# Altium PCB Copy of PCB1.PcbDoc (part 3 of 3)
Units mil, origin at the board's own origin, x right, y up, seen from the top; angles counter-clockwise.
Board outline 2060 x 2060 mil, 4 copper layers (L1, L2, L3, L4), stack 61.583 mil thick; 50 components, 94 nets, 313 pads, 31 vias.
Unrouted connection lines stored in the file: 190.
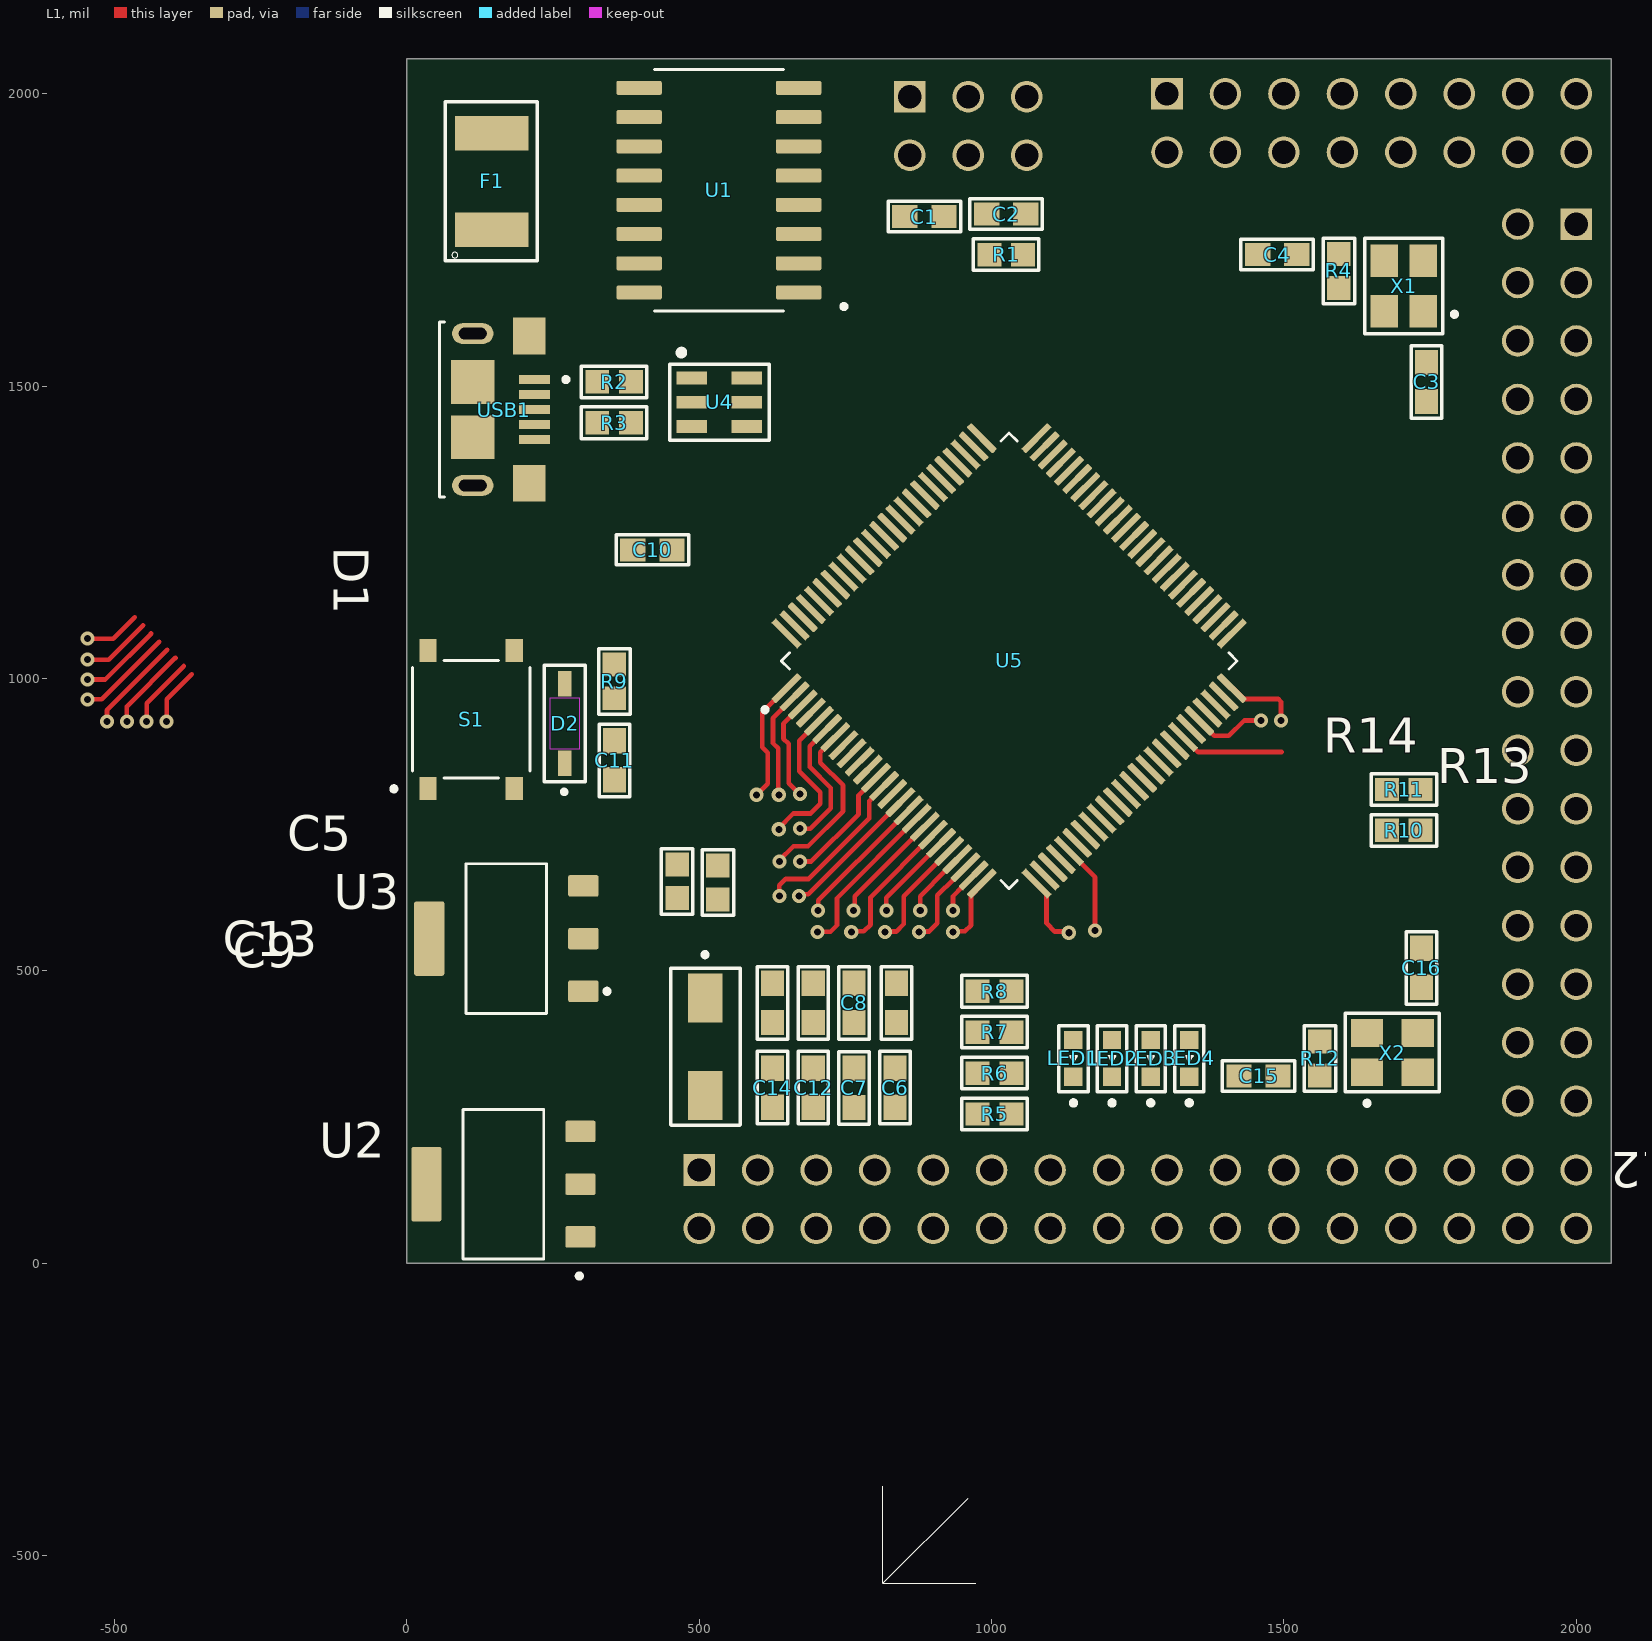
[diagram p0: L1 view]

## Part data (continued)
R5 R6 R7 R8 R13 R14: library part RC0603FR-071KL, "RES 1K OHM 1% 1/10W 0603", Case Code (Imperial)=0603, Manufacturer 1="Yageo Group", Max Operating Temperature=155°C, Min Operating Temperature=-55°C, Power Rating=100mW, Supplier Part Number 1=311-1.00KHRDKR-ND, Temperature Coefficient=100ppm/°C, Tolerance=1%, Voltage Rating=50V, Working Voltage=75V, Case Code (Metric)=0603, Case/Package=0603, China RoHS=Non-Compliant, ComponentLink1Description=https://datasheet.octopart.com:443/RC0603FR-071KL-Yageo-datasheet-175887523.pdf?src-supplier=Newark, ComponentLink1URL=https://datasheet.octopart.com:443/RC0603FR-071KL-Yageo-datasheet-175887523.pdf?src-supplier=Newark, ComponentLink2Description=https://datasheet.octopart.com:443/RC0603FR-071KL-Yageo-datasheet-34211833.pdf?src-supplier=Newark, ComponentLink2URL=https://datasheet.octopart.com:443/RC0603FR-071KL-Yageo-datasheet-34211833.pdf?src-supplier=Newark, ComponentLink3Description=https://datasheet.octopart.com:443/RC0603FR-071KL-Yageo-datasheet-12596169.pdf?src-supplier=Newark, ComponentLink3URL=https://datasheet.octopart.com:443/RC0603FR-071KL-Yageo-datasheet-12596169.pdf?src-supplier=Newark, ComponentLink4Description=https://datasheet.octopart.com:443/RC0603FR-071KL-Yageo-datasheet-499455.pdf?src-supplier=Newark, ComponentLink4URL=https://datasheet.octopart.com:443/RC0603FR-071KL-Yageo-datasheet-499455.pdf?src-supplier=Newark, ComponentLink5Description=https://datasheet.octopart.com:443/RC0603FR-071KL-Yageo-datasheet-503470.pdf?src-supplier=Newark, ComponentLink5URL=https://datasheet.octopart.com:443/RC0603FR-071KL-Yageo-datasheet-503470.pdf?src-supplier=Newark, ComponentLink6Description=https://datasheet.octopart.com:443/RC0603FR-071KL-Yageo-datasheet-62067350.pdf?src-supplier=element14+APAC, ComponentLink6URL=https://datasheet.octopart.com:443/RC0603FR-071KL-Yageo-datasheet-62067350.pdf?src-supplier=element14+APAC, ComponentLink7Description=https://datasheet.octopart.com:443/RC0603FR-071KL-Yageo-datasheet-21426514.pdf?src-supplier=element14+APAC, ComponentLink7URL=https://datasheet.octopart.com:443/RC0603FR-071KL-Yageo-datasheet-21426514.pdf?src-supplier=element14+APAC, ComponentLink8Description=https://datasheet.octopart.com:443/RC0603FR-071KL-Yageo-datasheet-141265859.pdf?src-supplier=Upverter, ComponentLink8URL=https://datasheet.octopart.com:443/RC0603FR-071KL-Yageo-datasheet-141265859.pdf?src-supplier=Upverter, ComponentLink9Description=https://datasheet.octopart.com:443/RC0603FR-071KL-Yageo-datasheet-103092701.pdf?src-supplier=Upverter, ComponentLink9URL=https://datasheet.octopart.com:443/RC0603FR-071KL-Yageo-datasheet-103092701.pdf?src-supplier=Upverter, ComponentLink10Description=https://sigma.octopart.com:443/138820526/technical_drawing/Yageo-RC0603FR-071KL.pdf?src-supplier=Upverter, ComponentLink10URL=https://sigma.octopart.com:443/138820526/technical_drawing/Yageo-RC0603FR-071KL.pdf?src-supplier=Upverter, ComponentLink11Description=https://datasheet.octopart.com:443/RC0603FR-071KL-Yageo-datasheet-68297981.pdf?src-supplier=Upverter, ComponentLink11URL=https://datasheet.octopart.com:443/RC0603FR-071KL-Yageo-datasheet-68297981.pdf?src-supplier=Upverter, ComponentLink12Description=https://datasheet.octopart.com:443/RC0603FR-071KL-Yageo-datasheet-8328172.pdf?src-supplier=Farnell, ComponentLink12URL=https://datasheet.octopart.com:443/RC0603FR-071KL-Yageo-datasheet-8328172.pdf?src-supplier=Farnell, ComponentLink13Description=https://datasheet.octopart.com:443/RC0603FR-071KL-Yageo-datasheet-13691069.pdf?src-supplier=Farnell, ComponentLink13URL=https://datasheet.octopart.com:443/RC0603FR-071KL-Yageo-datasheet-13691069.pdf?src-supplier=Farnell, ComponentLink14Description=https://datasheet.octopart.com:443/RC0603FR-071KL-Yageo-datasheet-15599030.pdf?src-supplier=Seeed+Studio, ComponentLink14URL=https://datasheet.octopart.com:443/RC0603FR-071KL-Yageo-datasheet-15599030.pdf?src-supplier=Seeed+Studio, ComponentLink15Description=https://datasheet.octopart.com:443/RC0603FR-071KL-Yageo-Group-datasheet-176638170.pdf?src-supplier=Future+Electronics, ComponentLink15URL=https://datasheet.octopart.com:443/RC0603FR-071KL-Yageo-Group-datasheet-176638170.pdf?src-supplier=Future+Electronics, ComponentLink16Description=https://datasheet.octopart.com:443/RC0603FR-071KL-Yageo-datasheet-164759695.pdf?src-supplier=Future+Electronics, ComponentLink16URL=https://datasheet.octopart.com:443/RC0603FR-071KL-Yageo-datasheet-164759695.pdf?src-supplier=Future+Electronics, ComponentLink17Description=https://datasheet.octopart.com:443/RC0603FR-071KL-Yageo-datasheet-137700087.pdf?src-supplier=Future+Electronics, ComponentLink17URL=https://datasheet.octopart.com:443/RC0603FR-071KL-Yageo-datasheet-137700087.pdf?src-supplier=Future+Electronics, ComponentLink18Description=https://datasheet.octopart.com:443/RC0603FR071KL-Yageo-datasheet-27584510.pdf?src-supplier=Future+Electronics, ComponentLink18URL=https://datasheet.octopart.com:443/RC0603FR071KL-Yageo-datasheet-27584510.pdf?src-supplier=Future+Electronics, ComponentLink19Description=https://datasheet.octopart.com:443/RC0603FR-071KL-Yageo-datasheet-8324193.pdf?src-supplier=Future+Electronics, ComponentLink19URL=https://datasheet.octopart.com:443/RC0603FR-071KL-Yageo-datasheet-8324193.pdf?src-supplier=Future+Electronics, ComponentLink20Description=https://datasheet.octopart.com:443/RC0603FR-071KL-Yageo-datasheet-79472498.pdf?src-supplier=Megastar, ComponentLink20URL=https://datasheet.octopart.com:443/RC0603FR-071KL-Yageo-datasheet-79472498.pdf?src-supplier=Megastar, ComponentLink21Description=https://datasheet.octopart.com/RC0603FR-071KL-Yageo-datasheet-73766026.pdf, ComponentLink21URL=https://datasheet.octopart.com/RC0603FR-071KL-Yageo-datasheet-73766026.pdf, ComponentLink22Description=https://datasheet.octopart.com:443/RC0603FR-071KL-Yageo-datasheet-118562.pdf?src-supplier=DigiKey, ComponentLink22URL=https://datasheet.octopart.com:443/RC0603FR-071KL-Yageo-datasheet-118562.pdf?src-supplier=DigiKey, ComponentLink23Description=http://sigma.octopart.com:80/conflict_mineral_statement/Yageo-company-3.pdf?src-supplier=Compliance+Statements, ComponentLink23URL=http://sigma.octopart.com:80/conflict_mineral_statement/Yageo-company-3.pdf?src-supplier=Compliance+Statements, ComponentLink24Description=http://sigma.octopart.com:80/rohs_statement/Yageo-company-2.pdf?src-supplier=Compliance+Statements, ComponentLink24URL=http://sigma.octopart.com:80/rohs_statement/Yageo-company-2.pdf?src-supplier=Compliance+Statements, Composition="Thick Film", Contact Plating=Tin, Country of Origin="Mainland China, Taiwan", Depth=800µm, Export Control Classification Number (ECCN) Code=EAR99, Harmonized Tariff Schedule (HTS) Code=8533.21.00.30, Height=450µm, Introduction Date=2004-10-04, Lead Free="Lead Free", Length=1.6mm, Lifecycle Status=Production, Manufacturer Part Number 1=RC0603FR-071KL, Military Standard=Not, Mounting Technology="Surface Mount", Number of Terminals=2, Packaging="Tape and Reel", Pins=2, Pricing 1="1=0.1, 10=0.025, 25=0.0188, 50=0.015, 100=0.0122, 250=0.0094, 500=0.00782, 1000=0.00661 (USD)", Radiation Hardening=No, REACH SVHC=Unaffected, RoHS=Compliant, Schedule B="8533210045, 8533210045|8533210045|8533210045|8533210045|8533210045|8533210045|8533210045|8533210045|8533210045|8533210045|8533210045|8533210045|8533210045|8533210045|8533210045|8533210045|8533210045|8533210045|8533210045|8533210045|8533210045|8533210045|8533210045|85", Stock 1=4851130, Supplier 1=DigiKey, Termination=SMD/SMT, Voltage Rating (DC)=50V, Width=800µm
S1: library part TS-1187A-B-A-B, "SWITCH TACTILE SPST-NO 0.05A 12V SMD 3X4MM"
U1: "USB to Serial UART Interface Controller IC, SOP-16, 5V/3.3V, 12MHz External Crystal Required"
U2: "IC REG LINEAR 5.1V 1A SOT-223-3L", Manufacturer=Revvo, Supplier Part Number=5272-AMS1117-5.0TR-ND, Category="LDO Voltage Regulators", Manufacturer Part Number=AMS1117-5.0, Pricing="2500=0.12353, 5000=0.11968, 7500=0.11775, 12500=0.11561, 17500=0.11436, 25000=0.11316 (USD)", Stock=12500, Supplier=DigiKey
U3: "IC REG LINEAR 3.3V 1A SOT-223-3L", Manufacturer="UMW(Youtai Semiconductor Co., Ltd.)", Supplier Part Number=4518-AMS1117-3.3TR-ND, Category="LDO Voltage Regulators", Manufacturer Part Number=AMS1117-3.3, Pricing="2500=0.1247, 5000=0.12082, 7500=0.11888, 12500=0.11673, 17500=0.11547, 25000=0.11426 (USD)", Stock=20000, Supplier=DigiKey
U4: library part SRV05-4MR6T1G, "TVS DIODE 5VWM 17.5VC 6TSOP", Breakdown Voltage=6V, Case/Package=TSOP, Clamping Voltage=17.5V, Leakage Current=5µA, Manufacturer=onsemi, Manufacturer Lifecycle Status=ACTIVE, Max Operating Temperature=125°C, Min Operating Temperature=-55°C, Peak Pulse Current=5A, Peak Pulse Power=300W, Power Line Protection=Yes, Reverse Standoff Voltage=5V, Supplier Part Number=488-SRV05-4MR6T1GDKR-ND, Category="TVS Diodes", China RoHS=Compliant, ComponentLink1Description=https://datasheet.octopart.com:443/SRV05-4MR6T1G-ON-Semiconductor-datasheet-101150056.pdf?src-supplier=Electro+Sonic, ComponentLink1URL=https://datasheet.octopart.com:443/SRV05-4MR6T1G-ON-Semiconductor-datasheet-101150056.pdf?src-supplier=Electro+Sonic, ComponentLink2Description=https://datasheet.octopart.com:443/SRV05-4MR6T1G-onsemi-datasheet-180969720.pdf?src-supplier=IHS, ComponentLink2URL=https://datasheet.octopart.com:443/SRV05-4MR6T1G-onsemi-datasheet-180969720.pdf?src-supplier=IHS, ComponentLink3Description=https://datasheet.octopart.com:443/SRV05-4MR6T1G-ON-Semiconductor-datasheet-37178284.pdf?src-supplier=Future+Electronics, ComponentLink3URL=https://datasheet.octopart.com:443/SRV05-4MR6T1G-ON-Semiconductor-datasheet-37178284.pdf?src-supplier=Future+Electronics, ComponentLink4Description=https://datasheet.octopart.com:443/SRV05-4MR6T1G-ON-Semiconductor-datasheet-100437403.pdf?src-supplier=Farnell, ComponentLink4URL=https://datasheet.octopart.com:443/SRV05-4MR6T1G-ON-Semiconductor-datasheet-100437403.pdf?src-supplier=Farnell, ComponentLink5Description=https://datasheet.octopart.com:443/SRV05-4MR6T1G-onsemi-datasheet-164731279.pdf?src-supplier=Newchip+Electronics+Limited, ComponentLink5URL=https://datasheet.octopart.com:443/SRV05-4MR6T1G-onsemi-datasheet-164731279.pdf?src-supplier=Newchip+Electronics+Limited, ComponentLink6Description=http://sigma.octopart.com:80/150631685/rohs_statement/ON-Semiconductor-SRV05-4MR6T1G.pdf?src-supplier=Compliance+Statements, ComponentLink6URL=http://sigma.octopart.com:80/150631685/rohs_statement/ON-Semiconductor-SRV05-4MR6T1G.pdf?src-supplier=Compliance+Statements, ComponentLink7Description=http://sigma.octopart.com:80/reach_statement/ON-Semiconductor-company-79.pdf?src-supplier=Compliance+Statements, ComponentLink7URL=http://sigma.octopart.com:80/reach_statement/ON-Semiconductor-company-79.pdf?src-supplier=Compliance+Statements, ComponentLink8Description=https://octopart.com:443/opatz8j6/c1?t=GRxjOYfY8n1k7dEGnypKsoXJdizG2AyD9Dp9f5Qv8c1VKoN6Hi3oNDCVMFQ1YA2smcwUYk7_76S3Ef3Va8VDMphxCFMUbAegA5s6gVuY1yDEeomlnwz1aAKRIpnWkIz8LXicEWMcXhbWzpBI80n6_k_-slWBpLxY0NALUvjCUcDg2IL1fScQjZ7PuufKuxm_nn3UzkM4saBqj0lTwdOAMWbn7IoLSNr2avL33e6zQMcHuFNsVRsb1LLhsdyz2XVsDLyzl6dAmv0uXcf72h1DDLkKQol2Y6UBQGHK0dqwsy23JJC0slEMc9s0aJfe8dT4jPLvdDcjp3fcfNZxSGJOQqM-c0A9ey8i6J50A0KjVuwk&src-supplier=Compliance+Statements, ComponentLink8URL=https://octopart.com:443/opatz8j6/c1?t=GRxjOYfY8n1k7dEGnypKsoXJdizG2AyD9Dp9f5Qv8c1VKoN6Hi3oNDCVMFQ1YA2smcwUYk7_76S3Ef3Va8VDMphxCFMUbAegA5s6gVuY1yDEeomlnwz1aAKRIpnWkIz8LXicEWMcXhbWzpBI80n6_k_-slWBpLxY0NALUvjCUcDg2IL1fScQjZ7PuufKuxm_nn3UzkM4saBqj0lTwdOAMWbn7IoLSNr2avL33e6zQMcHuFNsVRsb1LLhsdyz2XVsDLyzl6dAmv0uXcf72h1DDLkKQol2Y6UBQGHK0dqwsy23JJC0slEMc9s0aJfe8dT4jPLvdDcjp3fcfNZxSGJOQqM-c0A9ey8i6J50A0KjVuwk&src-supplier=Compliance+Statements, ComponentLink9Description=https://octopart.com:443/opatz8j6/c1?t=lIUu1jb1ZZRo0qNmGIs9ba_OX116NqmQw_7oX-a3VPsaRdpp2HX_z2MCNOU07deCx-7PfvGmO6_0MJ30XVqsocWFNYMuX7jSZV6OPR9qZBLnVN_NcijYgOZ6fSGcJacu18z9XUouhaVhsRzrXPPLHaw78_5sQ7NBQwHcDioWErEMnZRHVeQUftrR8xKUYOxNwSSeqHi24SW0Dez_z3TsJuZaMiNnjW8b7pRvXBZcZ57ZArFUxPiKq0rrWhwKV2e6QnTz9xddmIQnZCvSJURlCU66Y9JTKD93_tff41mJUd2RJ-VHH_GdqJ18jt0FG4i79NtaZFXnkA15LDipeISURt08TJ8Mcy9aqVk_kUsfhXY&src-supplier=Compliance+Statements, ComponentLink9URL=https://octopart.com:443/opatz8j6/c1?t=lIUu1jb1ZZRo0qNmGIs9ba_OX116NqmQw_7oX-a3VPsaRdpp2HX_z2MCNOU07deCx-7PfvGmO6_0MJ30XVqsocWFNYMuX7jSZV6OPR9qZBLnVN_NcijYgOZ6fSGcJacu18z9XUouhaVhsRzrXPPLHaw78_5sQ7NBQwHcDioWErEMnZRHVeQUftrR8xKUYOxNwSSeqHi24SW0Dez_z3TsJuZaMiNnjW8b7pRvXBZcZ57ZArFUxPiKq0rrWhwKV2e6QnTz9xddmIQnZCvSJURlCU66Y9JTKD93_tff41mJUd2RJ-VHH_GdqJ18jt0FG4i79NtaZFXnkA15LDipeISURt08TJ8Mcy9aqVk_kUsfhXY&src-supplier=Compliance+Statements, Depth=1.5mm, Direction=Unidirectional, Lead Free="Lead Free", Length=3mm, Lifecycle Status=Production, Manufacturer Part Number=SRV05-4MR6T1G, Min Breakdown Voltage=6V, Number of Bidirectional Channels=4, Number of Channels=4, Number of Elements=1, Number of Terminals=6, Packaging="Tape and Reel", Peak Reverse Current=5µA, Pins=6, Polarity=Unidirectional, Pricing="1=3.34, 10=2.171, 50=1.6658, 100=1.503, 500=1.21752 (USD)", Radiation Hardening=No, REACH SVHC=Unaffected, RoHS=Compliant, Schedule B="8536300000, 8536300000|8536300000|8536300000|8536300000|8536300000", Stock=11826, Supplier=DigiKey, Working Voltage=5V
U5: "IC MCU 8BIT 256KB FLASH 100TQFP", Case/Package=TQFP, Clock Frequency=16MHz, Manufacturer=Microchip, Manufacturer Lifecycle Status=REL, Max Operating Temperature=85°C, Max Supply Voltage=5.5V, Min Operating Temperature=-40°C, Min Supply Voltage=4.5V, Operating Supply Voltage=5V, Supplier Part Number=ATMEGA2560-16AU-ND, Access Time=16µs, Category=Microcontrollers, ComponentLink1Description=https://datasheet.octopart.com:443/ATMEGA2560-16AU-Microchip-datasheet-141243538.pdf?src-supplier=Microchip, ComponentLink1URL=https://datasheet.octopart.com:443/ATMEGA2560-16AU-Microchip-datasheet-141243538.pdf?src-supplier=Microchip, ComponentLink2Description=https://datasheet.octopart.com:443/ATMEGA2560-16AU-Microchip-datasheet-24967521.pdf?src-supplier=element14+APAC, ComponentLink2URL=https://datasheet.octopart.com:443/ATMEGA2560-16AU-Microchip-datasheet-24967521.pdf?src-supplier=element14+APAC, ComponentLink3Description=https://datasheet.octopart.com:443/ATMEGA2560-16AU-Microchip-datasheet-62057665.pdf?src-supplier=element14+APAC, ComponentLink3URL=https://datasheet.octopart.com:443/ATMEGA2560-16AU-Microchip-datasheet-62057665.pdf?src-supplier=element14+APAC, ComponentLink4Description=https://datasheet.octopart.com:443/ATMEGA2560-16AU-Microchip-datasheet-46907977.pdf?src-supplier=SHENGYU+ELECTRONICS, ComponentLink4URL=https://datasheet.octopart.com:443/ATMEGA2560-16AU-Microchip-datasheet-46907977.pdf?src-supplier=SHENGYU+ELECTRONICS, ComponentLink5Description=https://sigma.octopart.com:443/138797047/technical_drawing/Microchip-ATMEGA2560-16AU.pdf?src-supplier=Upverter, ComponentLink5URL=https://sigma.octopart.com:443/138797047/technical_drawing/Microchip-ATMEGA2560-16AU.pdf?src-supplier=Upverter, ComponentLink6Description=https://datasheet.octopart.com:443/ATMEGA2560-16AU-Microchip-datasheet-136948588.pdf?src-supplier=Master+Electronics, ComponentLink6URL=https://datasheet.octopart.com:443/ATMEGA2560-16AU-Microchip-datasheet-136948588.pdf?src-supplier=Master+Electronics, ComponentLink7Description=https://datasheet.octopart.com:443/ATMEGA2560-16AU-Atmel-datasheet-5357710.pdf?src-supplier=TME, ComponentLink7URL=https://datasheet.octopart.com:443/ATMEGA2560-16AU-Atmel-datasheet-5357710.pdf?src-supplier=TME, ComponentLink8Description=https://datasheet.octopart.com:443/ATMEGA2560-16AU-Microchip-datasheet-12542.pdf?src-supplier=element14, ComponentLink8URL=https://datasheet.octopart.com:443/ATMEGA2560-16AU-Microchip-datasheet-12542.pdf?src-supplier=element14, ComponentLink9Description=https://datasheet.octopart.com:443/ATMEGA2560-16AU-Atmel-datasheet-13399453.pdf?src-supplier=_legacy+Avnet, ComponentLink9URL=https://datasheet.octopart.com:443/ATMEGA2560-16AU-Atmel-datasheet-13399453.pdf?src-supplier=_legacy+Avnet, ComponentLink10Description=https://datasheet.octopart.com:443/ATMEGA2560-16AU-Microchip-datasheet-120916.pdf?src-supplier=RS+(Formerly+Allied+Electronics), ComponentLink10URL=https://datasheet.octopart.com:443/ATMEGA2560-16AU-Microchip-datasheet-120916.pdf?src-supplier=RS+(Formerly+Allied+Electronics), ComponentLink11Description=http://sigma.octopart.com:80/188449921/materials_sheet/Microchip-ATMEGA2560-16AU.pdf?src-supplier=Compliance+Statements, ComponentLink11URL=http://sigma.octopart.com:80/188449921/materials_sheet/Microchip-ATMEGA2560-16AU.pdf?src-supplier=Compliance+Statements, ComponentLink12Description=http://sigma.octopart.com:80/rohs_statement/Microchip-company-71.pdf?src-supplier=Compliance+Statements, ComponentLink12URL=http://sigma.octopart.com:80/rohs_statement/Microchip-company-71.pdf?src-supplier=Compliance+Statements, ComponentLink13Description=http://sigma.octopart.com:80/reach_statement/Microchip-company-70.pdf?src-supplier=Compliance+Statements, ComponentLink13URL=http://sigma.octopart.com:80/reach_statement/Microchip-company-70.pdf?src-supplier=Compliance+Statements, ComponentLink14Description=http://sigma.octopart.com:80/conflict_mineral_statement/Microchip-company-69.pdf?src-supplier=Compliance+Statements, ComponentLink14URL=http://sigma.octopart.com:80/conflict_mineral_statement/Microchip-company-69.pdf?src-supplier=Compliance+Statements, ComponentLink15Description=http://sigma.octopart.com:80/conflict_mineral_statement/Microchip-company-68.pdf?src-supplier=Compliance+Statements, ComponentLink15URL=http://sigma.octopart.com:80/conflict_mineral_statement/Microchip-company-68.pdf?src-supplier=Compliance+Statements, ComponentLink16Description=http://sigma.octopart.com:80/reach_statement/Atmel-company-6.pdf?src-supplier=Compliance+Statements, ComponentLink16URL=http://sigma.octopart.com:80/reach_statement/Atmel-company-6.pdf?src-supplier=Compliance+Statements, ComponentLink17Description=http://sigma.octopart.com:80/rohs_statement/Atmel-company-5.pdf?src-supplier=Compliance+Statements, ComponentLink17URL=http://sigma.octopart.com:80/rohs_statement/Atmel-company-5.pdf?src-supplier=Compliance+Statements, ComponentLink18Description=http://sigma.octopart.com:80/rohs_statement/Atmel-company-4.pdf?src-supplier=Compliance+Statements, ComponentLink18URL=http://sigma.octopart.com:80/rohs_statement/Atmel-company-4.pdf?src-supplier=Compliance+Statements, Core Architecture=AVR, Country of Assembly=Thailand, Country of Fabrication="United States of America", Country of Origin=Thailand, Data Bus Width=8b, Density=2Mb, Export Control Classification Number (ECCN) Code=EAR99, Frequency=16MHz, Harmonized Tariff Schedule (HTS) Code=8542.31.0015, Height=1.2mm, HS Code=8542.31.0015, Interface="2-Wire, I2C, SPI, USART", Lead Free="Lead Free", Length=14.1mm, Lifecycle Status=Production, Manufacturer Part Number=ATMEGA2560-16AU, Memory Format=FLASH, Memory Size=256kB, Mounting Technology="Surface Mount", Number of A/D Converters=1, Number of ADC Channels=16, Number of I2C Channels=1, Number of I/Os=86, Number of Programmable I/O=86, Number of PWM Channels=20, Number of SPI Channels=5, Number of Terminals=100, Number of Timers/Counters=6, Number of UART Channels=4, Oscillator Type=Internal, Peripherals="Brown-out Detect/Reset, POR, PWM, WDT", Pins=100, Pricing="1=18.11 (USD)", Projected EOL Date=2039-11-01, Radiation Hardening=No, RAM Size=8kB, REACH SVHC=Unaffected, RoHS=Compliant, Schedule B="8542310000, 8542310000|8542310000|8542310000|8542310000|8542310000", Stock=12847, Supplier=DigiKey, Termination=SMD/SMT, Watchdog Timer=Yes, Width=14.1mm
USB1: library part 10118193-0001LF, "CONN RCPT USB2.0 MICRO B SMD R/A", Color=Black, Contact Resistance=30mΩ, Current Rating=1.8A, Dielectric Material="Liquid Crystal Polymer", Flammability Rating="UL94 V-0", Insulation Resistance=1GΩ, Manufacturer="Amphenol Communications Solutions", Max Operating Temperature=80°C, Max Voltage Rating (AC)=100V, Min Operating Temperature=-55°C, Operating Force=35.1392N, Supplier Part Number=609-4616-1-ND, Category="USB Connectors", China RoHS=Compliant, ComponentLink1Description=https://datasheet.octopart.com:443/10118193-0001LF-Amphenol-Communications-Solutions-datasheet-182239125.pdf?src-supplier=IHS, ComponentLink1URL=https://datasheet.octopart.com:443/10118193-0001LF-Amphenol-Communications-Solutions-datasheet-182239125.pdf?src-supplier=IHS, ComponentLink2Description=https://datasheet.octopart.com:443/10118193-0001LF-Amphenol-Communications-Solutions-datasheet-55953155.pdf?src-supplier=TME, ComponentLink2URL=https://datasheet.octopart.com:443/10118193-0001LF-Amphenol-Communications-Solutions-datasheet-55953155.pdf?src-supplier=TME, ComponentLink3Description=https://datasheet.octopart.com:443/10118193-0001LF-Amphenol-ICC-datasheet-116246833.pdf?src-supplier=Upverter, ComponentLink3URL=https://datasheet.octopart.com:443/10118193-0001LF-Amphenol-ICC-datasheet-116246833.pdf?src-supplier=Upverter, ComponentLink4Description=https://datasheet.octopart.com:443/10118193-0001LF-FCI-datasheet-141913714.pdf?src-supplier=Upverter, ComponentLink4URL=https://datasheet.octopart.com:443/10118193-0001LF-FCI-datasheet-141913714.pdf?src-supplier=Upverter, ComponentLink5Description=https://datasheet.octopart.com:443/10118193-0001LF-Amphenol-Communications-Solutions-datasheet-96019471.pdf?src-supplier=element14+APAC, ComponentLink5URL=https://datasheet.octopart.com:443/10118193-0001LF-Amphenol-Communications-Solutions-datasheet-96019471.pdf?src-supplier=element14+APAC, ComponentLink6Description=https://datasheet.octopart.com:443/10118193-0001LF-Amphenol-Communications-Solutions-datasheet-11792339.pdf?src-supplier=Electro+Sonic, ComponentLink6URL=https://datasheet.octopart.com:443/10118193-0001LF-Amphenol-Communications-Solutions-datasheet-11792339.pdf?src-supplier=Electro+Sonic, ComponentLink7Description=https://datasheet.octopart.com:443/10118193-0001LF-Amphenol-Communications-Solutions-datasheet-13702206.pdf?src-supplier=RS+(Formerly+Allied+Electronics), ComponentLink7URL=https://datasheet.octopart.com:443/10118193-0001LF-Amphenol-Communications-Solutions-datasheet-13702206.pdf?src-supplier=RS+(Formerly+Allied+Electronics), Connector Type="Receptacle, USB", Contact Material="Gold, Nickel", Contact Plating=Gold, Depth=5.67mm, Features=Shielded, Gender=Female, Height=3mm, Housing Material=Polymer, Length=7.86mm, Lifecycle Status=Production, Manufacturer Part Number=10118193-0001LF, Mounting Technology="Horizontal, Surface Mount", Number of Contacts=5, Number of Ports=1, Number of Positions=5, Number of Rows=1, Number of Terminals=5, Orientation="Right Angle", Pins=11, Pitch=650µm, Plating Thickness=762nm, Pricing="1=0.5, 10=0.422, 25=0.3952, 50=0.3762, 100=0.3583, 250=0.3358, 500=0.31976 (USD)", Radiation Hardening=No, REACH SVHC=Unaffected, RoHS=Compliant, Shell Material="Stainless Steel", Stock=63727, Supplier=DigiKey, Terminal Pitch=660.4µm, Termination=Solder, USB Standard="USB 2.0", Voltage Rating=100V
X1: library part 7M-12.000MAAJ-T, "CRYSTAL 12.0000MHZ 18PF SMD", Case/Package=SMD/SMT, ESR (Equivalent Series Resistance)=80Ω, Frequency Stability=30ppm, Frequency Tolerance=0.003%, Load Capacitance=18pF, Manufacturer 1=TXC, Max Operating Temperature=70°C, Min Operating Temperature=-20°C, Supplier Part Number 1=887-1121-2-ND, China RoHS=Compliant, ComponentLink1Description=https://datasheet.octopart.com:443/7M-12.000MAAJ-T-TXC-datasheet-175949319.pdf?src-supplier=Newark, ComponentLink1URL=https://datasheet.octopart.com:443/7M-12.000MAAJ-T-TXC-datasheet-175949319.pdf?src-supplier=Newark, ComponentLink2Description=https://datasheet.octopart.com:443/7M-12.000MAAJ-T-TXC-datasheet-142346318.pdf?src-supplier=TME, ComponentLink2URL=https://datasheet.octopart.com:443/7M-12.000MAAJ-T-TXC-datasheet-142346318.pdf?src-supplier=TME, ComponentLink3Description=https://datasheet.octopart.com:443/7M-12.000MAAJ-T-TXC-datasheet-24897103.pdf?src-supplier=ODG+(Origin+Data+Global), ComponentLink3URL=https://datasheet.octopart.com:443/7M-12.000MAAJ-T-TXC-datasheet-24897103.pdf?src-supplier=ODG+(Origin+Data+Global), ComponentLink4Description=https://datasheet.octopart.com:443/7M-12.000MAAJ-T-TXC-datasheet-10340792.pdf?src-supplier=element14+APAC, ComponentLink4URL=https://datasheet.octopart.com:443/7M-12.000MAAJ-T-TXC-datasheet-10340792.pdf?src-supplier=element14+APAC, ComponentLink5Description=https://datasheet.octopart.com:443/7M-12.000MAAJ-T-TXC-datasheet-15207195.pdf?src-supplier=element14+APAC, ComponentLink5URL=https://datasheet.octopart.com:443/7M-12.000MAAJ-T-TXC-datasheet-15207195.pdf?src-supplier=element14+APAC, ComponentLink6Description=https://datasheet.octopart.com:443/7M-12.000MAAJ-T-TXC-datasheet-8857452.pdf?src-supplier=Farnell, ComponentLink6URL=https://datasheet.octopart.com:443/7M-12.000MAAJ-T-TXC-datasheet-8857452.pdf?src-supplier=Farnell, ComponentLink7Description=https://datasheet.octopart.com:443/7M-12.000MAAJ-T-TXC-datasheet-10545748.pdf?src-supplier=Farnell, ComponentLink7URL=https://datasheet.octopart.com:443/7M-12.000MAAJ-T-TXC-datasheet-10545748.pdf?src-supplier=Farnell, ComponentLink8Description=https://datasheet.octopart.com:443/7M-12.000MAAJ-T-TXC-datasheet-10379982.pdf?src-supplier=Farnell, ComponentLink8URL=https://datasheet.octopart.com:443/7M-12.000MAAJ-T-TXC-datasheet-10379982.pdf?src-supplier=Farnell, Country of Origin="Mainland China", Depth=2.5mm, ESR=80Ω, Frequency=12MHz, Harmonized Tariff Schedule (HTS) Code=8541.60.00.50, Height=800µm, Introduction Date=2009-02-20, Lead Free="Lead Free", Length=3.2mm, Lifecycle Status=Production, Manufacturer Part Number 1=7M-12.000MAAJ-T, Mounting Technology="Surface Mount", Packaging="Tape & Reel", Pins=4, Pricing 1="3000=0.54592, 6000=0.52337, 9000=0.51063, 15000=0.49502 (USD)", REACH SVHC=Unaffected, RoHS=Compliant, Schedule B="8541600080, 8541600080|8541600080|8541600080|8541600080|8541600080", Stock 1=8397, Supplier 1=DigiKey, Termination=SMD/SMT, Tolerance=0.003%, Width=2.4892mm
X2: library part 7M-16.000MAAJ-T, "CRYSTAL 16.0000MHZ 18PF SMD", Case/Package=SMD/SMT, ESR (Equivalent Series Resistance)=60Ω, Frequency=16MHz, Frequency Stability=30ppm, Frequency Tolerance=0.003%, Load Capacitance=18pF, Manufacturer 1=TXC, Max Operating Temperature=70°C, Min Operating Temperature=-20°C, Supplier Part Number 1=887-1125-1-ND, China RoHS=Compliant, ComponentLink1Description=https://datasheet.octopart.com:443/7M-16.000MAAJ-T-TXC-datasheet-175949319.pdf?src-supplier=Newark, ComponentLink1URL=https://datasheet.octopart.com:443/7M-16.000MAAJ-T-TXC-datasheet-175949319.pdf?src-supplier=Newark, ComponentLink2Description=https://datasheet.octopart.com:443/7M-16.000MAAJ-T-TXC-datasheet-142346318.pdf?src-supplier=TME, ComponentLink2URL=https://datasheet.octopart.com:443/7M-16.000MAAJ-T-TXC-datasheet-142346318.pdf?src-supplier=TME, ComponentLink3Description=https://datasheet.octopart.com:443/7M-16.000MAAJ-T-TXC-datasheet-24897103.pdf?src-supplier=element14+APAC, ComponentLink3URL=https://datasheet.octopart.com:443/7M-16.000MAAJ-T-TXC-datasheet-24897103.pdf?src-supplier=element14+APAC, ComponentLink4Description=https://datasheet.octopart.com:443/7M-16.000MAAJ-T-TXC-datasheet-10340792.pdf?src-supplier=Future+Electronics, ComponentLink4URL=https://datasheet.octopart.com:443/7M-16.000MAAJ-T-TXC-datasheet-10340792.pdf?src-supplier=Future+Electronics, ComponentLink5Description=https://datasheet.octopart.com:443/7M-16.000MAAJ-T-TXC-datasheet-8857452.pdf?src-supplier=Farnell, ComponentLink5URL=https://datasheet.octopart.com:443/7M-16.000MAAJ-T-TXC-datasheet-8857452.pdf?src-supplier=Farnell, ComponentLink6Description=https://datasheet.octopart.com:443/7M-16.000MAAJ-T-TXC-datasheet-10545748.pdf?src-supplier=Farnell, ComponentLink6URL=https://datasheet.octopart.com:443/7M-16.000MAAJ-T-TXC-datasheet-10545748.pdf?src-supplier=Farnell, ComponentLink7Description=https://datasheet.octopart.com:443/7M-16.000MAAJ-T-TXC-datasheet-10379982.pdf?src-supplier=Farnell, ComponentLink7URL=https://datasheet.octopart.com:443/7M-16.000MAAJ-T-TXC-datasheet-10379982.pdf?src-supplier=Farnell, Country of Origin="Mainland China", Depth=2.5mm, ESR=60Ω, Height=800µm, Introduction Date=2014-01-27, Length=3.2mm, Lifecycle Status=Production, Manufacturer Part Number 1=7M-16.000MAAJ-T, Mounting Technology="Surface Mount", Packaging="Tape & Reel", Pins=4, Pricing 1="1=0.64, 10=0.553, 25=0.5228, 50=0.501, 100=0.4803, 250=0.45424, 500=0.43544, 1000=0.41743 (USD)", REACH SVHC=Unaffected, RoHS=Compliant, Schedule B="8541600080, 8541600080|8541600080|8541600080|8541600080|8541600080", Stock 1=43226, Supplier 1=DigiKey, Termination=SMD/SMT, Tolerance=0.003%, Width=2.5mm

## Via types
v1: diameter 24, hole 12, L1 to L4, tented both sides, 31 vias

## Nets (pads, with @x,y where several pads share a name; then routed paths per layer and width w, separated by ;. In a path a pad name is that pad's centre, name@x,y a point inside that pad or via, vN(x,y) a via of type N, cw(c..) or ccw(c..) an arc to the next point about the centre after c; other vN are vias at no path point)
3.3V: C8.2 C9.2 H1.07 H1.08 U3.2
+5V: C6.2 C7.2 C12.2 C13.2 C14.2 D2.1 F1.2 H1.05 H1.06 H4.02 R5.1 R6.1 R7.1 R9.2 R10.2 R11.2 U1.16 U2.2 U3.3 U4.5 U5.10 U5.31 U5.61 U5.80 U5.100
A0: H3.01 U5.97
A1: H3.02 U5.96
A2: H3.03 U5.95
A3: H3.04 U5.94 | length 0
A4: H3.05 U5.93
A5: H3.06 U5.92
A6: H3.07 U5.91
A7: H3.08 U5.90
A8: H3.09 U5.89
A9: H3.10 U5.88
A10: H3.11 U5.87
A11: H3.12 U5.86
A12: H3.13 U5.85
A13: H3.14 U5.84
A14: H3.15 U5.83
A15: H3.16 U5.82
AREF: C10.1 H1.09 U5.98
D0: H1.11 R13.2 U5.2 | length 187.8
  L1 w8: v1(636,801) 635,802 635,880.54 626,889.54 626,931.98 643.76,949.75 643.76,949.99 U5.2
  other v1: -546,1032
D1: H1.12 R14.2 U5.3 | length 178.7
  L1 w8: v1(672,802) 653,821 653,888 644,897 644,922.14 677,955.15 U5.3
  other v1: -546,998
D2: H1.13 U5.6 | length 230.4
  L1 w8: v1(672,743) 690,743 725,778 725,812.54 689,848.54 689,883.63 699.44,894.07 699.44,894.31 U5.6
  other v1: -479,926
D3: H1.14 U5.7 | length 299.2
  L1 w8: v1(637,687) 637,688.77 661.23,713 686,713 746,773 746,817 707,856 707,873.79 713.36,880.15 713.36,880.39 U5.7
  other v1: -445,926
D4: H1.15 U5.1 | length 210.9
  L1 w8: v1(598,801) 617,820 617,873.09 608,882.09 608,939.44 608,941.82 649.16,982.99 U5.1
  other v1: -546,1068
D5: H1.16 U5.5 | length 261.1
  L1 w8: v1(636,742) 636,743.77 661.23,769 690.54,769 707,785.46 707,805.09 671,841.09 671,893.47 685.52,907.99 685.52,908.23 U5.5
  other v1: -513,926
D6: H1.17 U5.15 | length 239.5
  L1 w8: v1(671,628) 674.06,631.06 686.49,631.06 843.79,788.36 U5.15
D7: H1.18 U5.16 | length 235.8
  L1 w8: v1(703,603) 703.61,603.61 703.61,620.34 838.39,755.12 838.64,755.12 U5.16
D8: H1.19 U5.17 | length 277.6
  L1 w8: v1(702,566.48) 724.48,566.48 735.59,577.59 735.59,624.24 U5.17
D9: H1.20 U5.18 | length 194.2
  L1 w8: v1(764,603) 766,605 766,627.05 866.23,727.28 866.47,727.28 U5.18
D10: H1.21 U5.23 | length 151
  L1 w8: v1@878,567 878.21,567.21 893.21,567.21 907,581 907,628.86 935.83,657.68 936.07,657.68 U5.23
  other v1: 876,566.48
D11: H1.22 U5.24 | length 76.7
  L1 w8: v1@934,601 934,627.53 949.99,643.52 949.99,643.76 U5.24
  other v1: 934,603
D12: H1.23 U5.25 | length 114.2
  L1 w8: v1@934,567 934.47,567.47 954.47,567.47 964.86,577.86 964.86,628.65 982.99,646.78 U5.25@982.99,649.16
  other v1: 934,566.48
D13: H1.24 R8.1 U5.26 | length 120.9
  L1 w8: U5.26 1095.14,630.79 1095.14,628.65 1094,627.51 1094,581 1108,567 1130,567 v1(1132,565)
D14: H1.25 U5.64
D15: H1.26 U5.63
D16: H1.27 U5.13 | length 285.3
  L1 w8: v1(637,628) 637,646 648,657 686.98,657 790.52,760.54 790.52,790.27 796.88,796.63 796.88,796.88 U5.13
D17: H1.28 U5.12 | length 208.5
  L1 w8: v1(672,687) 691.52,687 772.52,768 772.52,800.11 782.96,810.55 782.96,810.8 U5.12
D18: H1.29 U5.46 | length 127.3
  L1 w8: U5.46 1355.4,927.55 1381.08,901.87 1405.87,901.87 1432,928 v1(1461,928)
D19: H1.30 U5.45
D20: H1.31 R11.1 U5.44 | length 179.3
  L1 w8: U5.44 1327.56,899.71 1353.28,874 1496,874
D21: H1.32 R10.1 U5.43
D22: H2.01 U5.78
D23: H2.02 U5.77
D24: H2.03 U5.76
D25: H2.04 U5.75
D26: H2.05 U5.74
D27: H2.06 U5.73
D28: H2.07 U5.72
D29: H2.08 U5.71
D30: H2.09 U5.60
D31: H2.10 U5.59
D32: H2.11 U5.58
D33: H2.12 U5.57
D34: H2.13 U5.56
D35: H2.14 U5.55
D36: H2.15 U5.54
D37: H2.16 U5.53
D38: H2.17 U5.50 | length 126.9
  L1 w8: U5.50 1412.97,983.23 1431.35,964.86 1490.31,964.86 1495,960.17 v1@1495,927
  other v1: 1495,928
D39: H2.18 U5.70
D40: H2.19 U5.52
D41: H2.20 U5.51
D42: H2.21 U5.42
D43: H2.22 U5.41
D44: H2.23 U5.40
D45: H2.24 U5.39
D46: H2.25 U5.38
D47: H2.26 U5.37
D48: H2.27 U5.36
D49: H2.28 U5.35
GND: C1.1 C3.1 C4.1 C5.1 C6.1 C7.1 C8.1 C9.1 C10.2 C11.1 C12.1 C13.1 C14.1 C15.1 C16.1 H1.03 H1.04 H4.06 LED3.C LED4.C R1.2 S1.A S1.B U1.1 U2.1 U3.1 U4.2 U5.11 U5.32 U5.62 U5.81 U5.99 USB1.5 USB1.S1 USB1.S2 USB1.S3 USB1.S4 USB1.S5 USB1.S6 X1.2 X1.4 X2.2 X2.4
MISO: H2.29 H4.01 U5.22 | length 115.4
  L1 w8: v1@878,602 878,627.7 921.91,671.6 922.15,671.6 U5.22
  other v1: 878,603
MOSI: H2.30 H4.04 U5.21 | length 193.5
  L1 w8: v1@819,567 837,567 850,580 850,627.53 907.99,685.52 908.23,685.52 U5.21
  other v1: 818,566.48
NetC1_2: C1.2 U1.4
NetC2_1: C2.1 R1.1 U1.13
NetC3_2: C3.2 R4.2 U1.7 X1.1
NetC4_2: C4.2 R4.1 U1.8 X1.3
NetC5_2: C5.2 D1.C U2.3
NetF1_1: F1.1 USB1.1
NetLED1_A: LED1.A R5.2
NetLED2_A: LED2.A R6.2
NetLED3_A: LED3.A R7.2
NetLED4_A: LED4.A R8.2
NetR2_1: R2.1 USB1.2
NetR3_1: R3.1 USB1.3
RESET: C2.2 C11.2 D2.2 H1.10 H4.05 R9.1 S1.C S1.D U5.30 | length 154.3
  L1 w8: U5.30 1132.45,704.6 1177,660.04 v1(1177,569)
RXD: LED2.C R14.1 U1.3
SCK: H2.31 H4.03 U5.20 | length 154.5
  L1 w8: v1(820,603) 820,624.88 894.31,699.2 894.31,699.44 U5.20
SS: H2.32 U5.19 | length 230.9
  L1 w8: v1@765,567 765.51,567.51 781.51,567.51 793,579 793,625.97 U5.19
  other v1: 760,566.48
TXD: LED1.C R13.1 U1.2
USB_N: R2.2 U1.6 U4.1
USB_P: R3.2 U1.5 U4.3
VIN: D1.A H1.01 H1.02
XTAL1: C16.2 R12.1 U5.34 X2.3
XTAL2: C15.2 R12.2 U5.33 X2.1
pads on no net: U1.9 U1.10 U1.11 U1.12 U1.14 U1.15 U2.4 U4.4 U4.6 U5.4 U5.8 U5.9 U5.14 U5.27 U5.28 U5.29 U5.47 U5.48 U5.49 U5.65 U5.66 U5.67 U5.68 U5.69 U5.79 USB1.4
copper on no net: | length 1048.2
  L1 w8: -546,998 -516.37,998 -437.61,1076.76 ; -546,1032 -509.97,1032 -451.29,1090.68 ; -546,1068 -502.05,1068 -465.45,1104.6 ; v1@-545.71,964.29 -522,964.29 -423.45,1062.84 ; -513,926 -513,945.7 -409.77,1048.92 ; -479,926 -479,951.86 -395.85,1035 ; -445,926 -445,957.77 -381.69,1021.08 ; v1(-411,926) -411,964.18 -368.01,1007.16
  other v1: -546,964

## Polygon pours and split planes (outlines as drawn)
GND on L2 (split plane): 2039.9,20.1 20.1,20.1 20.1,2039.9 2039.9,2039.9

## Silkscreen, mask and mechanical layers (free items; w line width, h text height)
Top Overlay:
  lines w2: 814,-382 814,-548 ; 960,-402 814,-548 ; 973,-548 814,-548

## Text inside footprints (layer, text, board x,y; h text height)
USB1: Mechanical 13 "PCB END" at 65.36,1268.98 h16 r270